# Altium PCB top.PcbDoc
Units mil, origin at the board's own origin, x right, y up, seen from the top; angles counter-clockwise.
Board outline 2922 x 2922 mil, 2 copper layers (Top Layer, Bottom Layer); 13 components, 9 nets, 93 pads, 29 vias.
Unrouted connection lines stored in the file: 21.
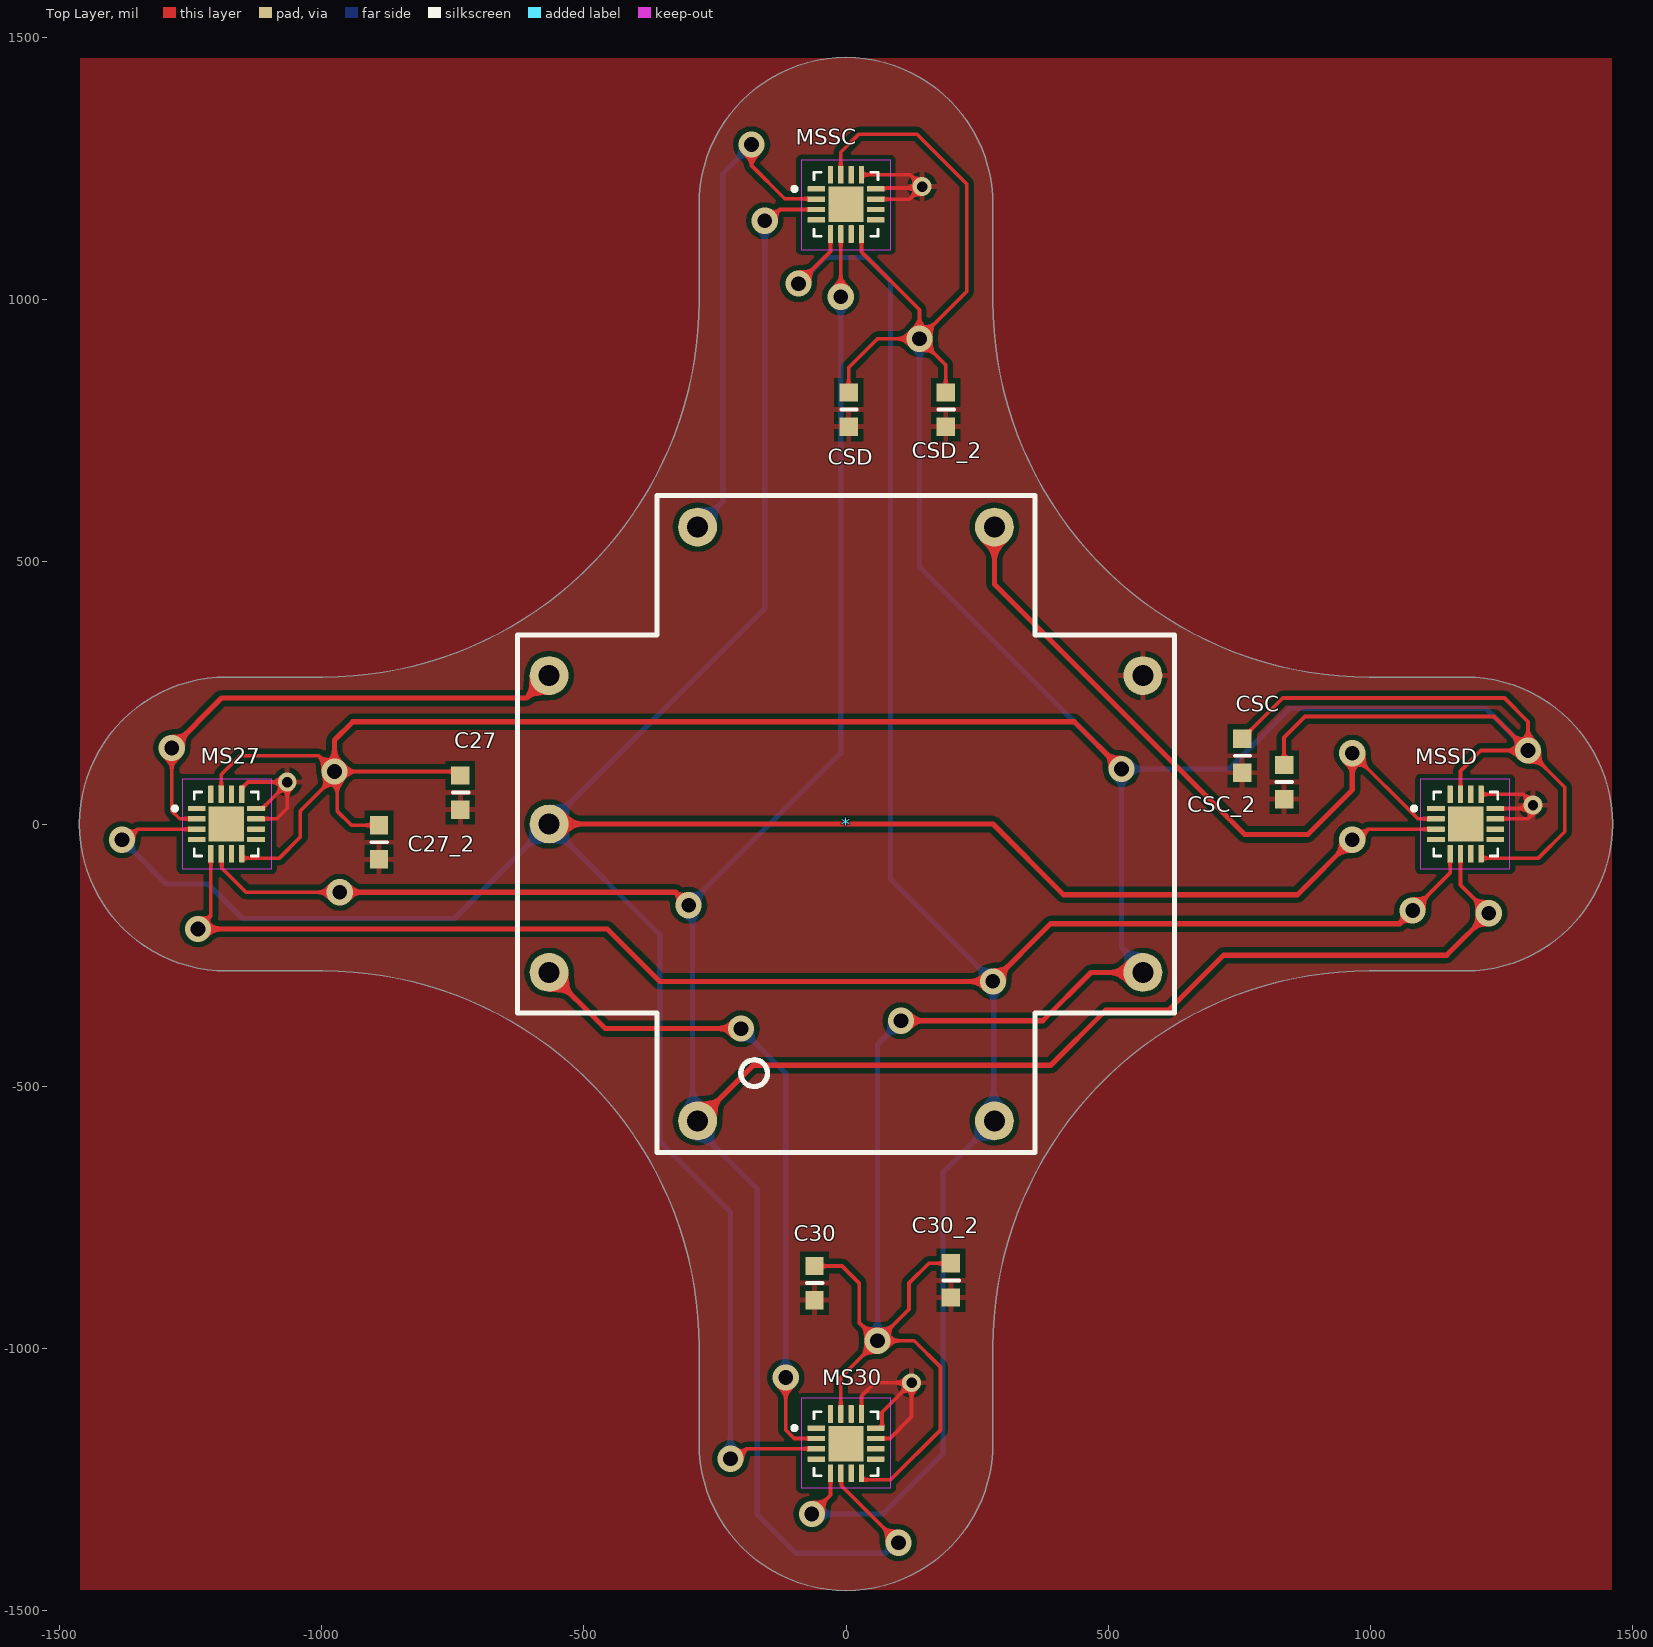
[diagram p0: Top Layer view]
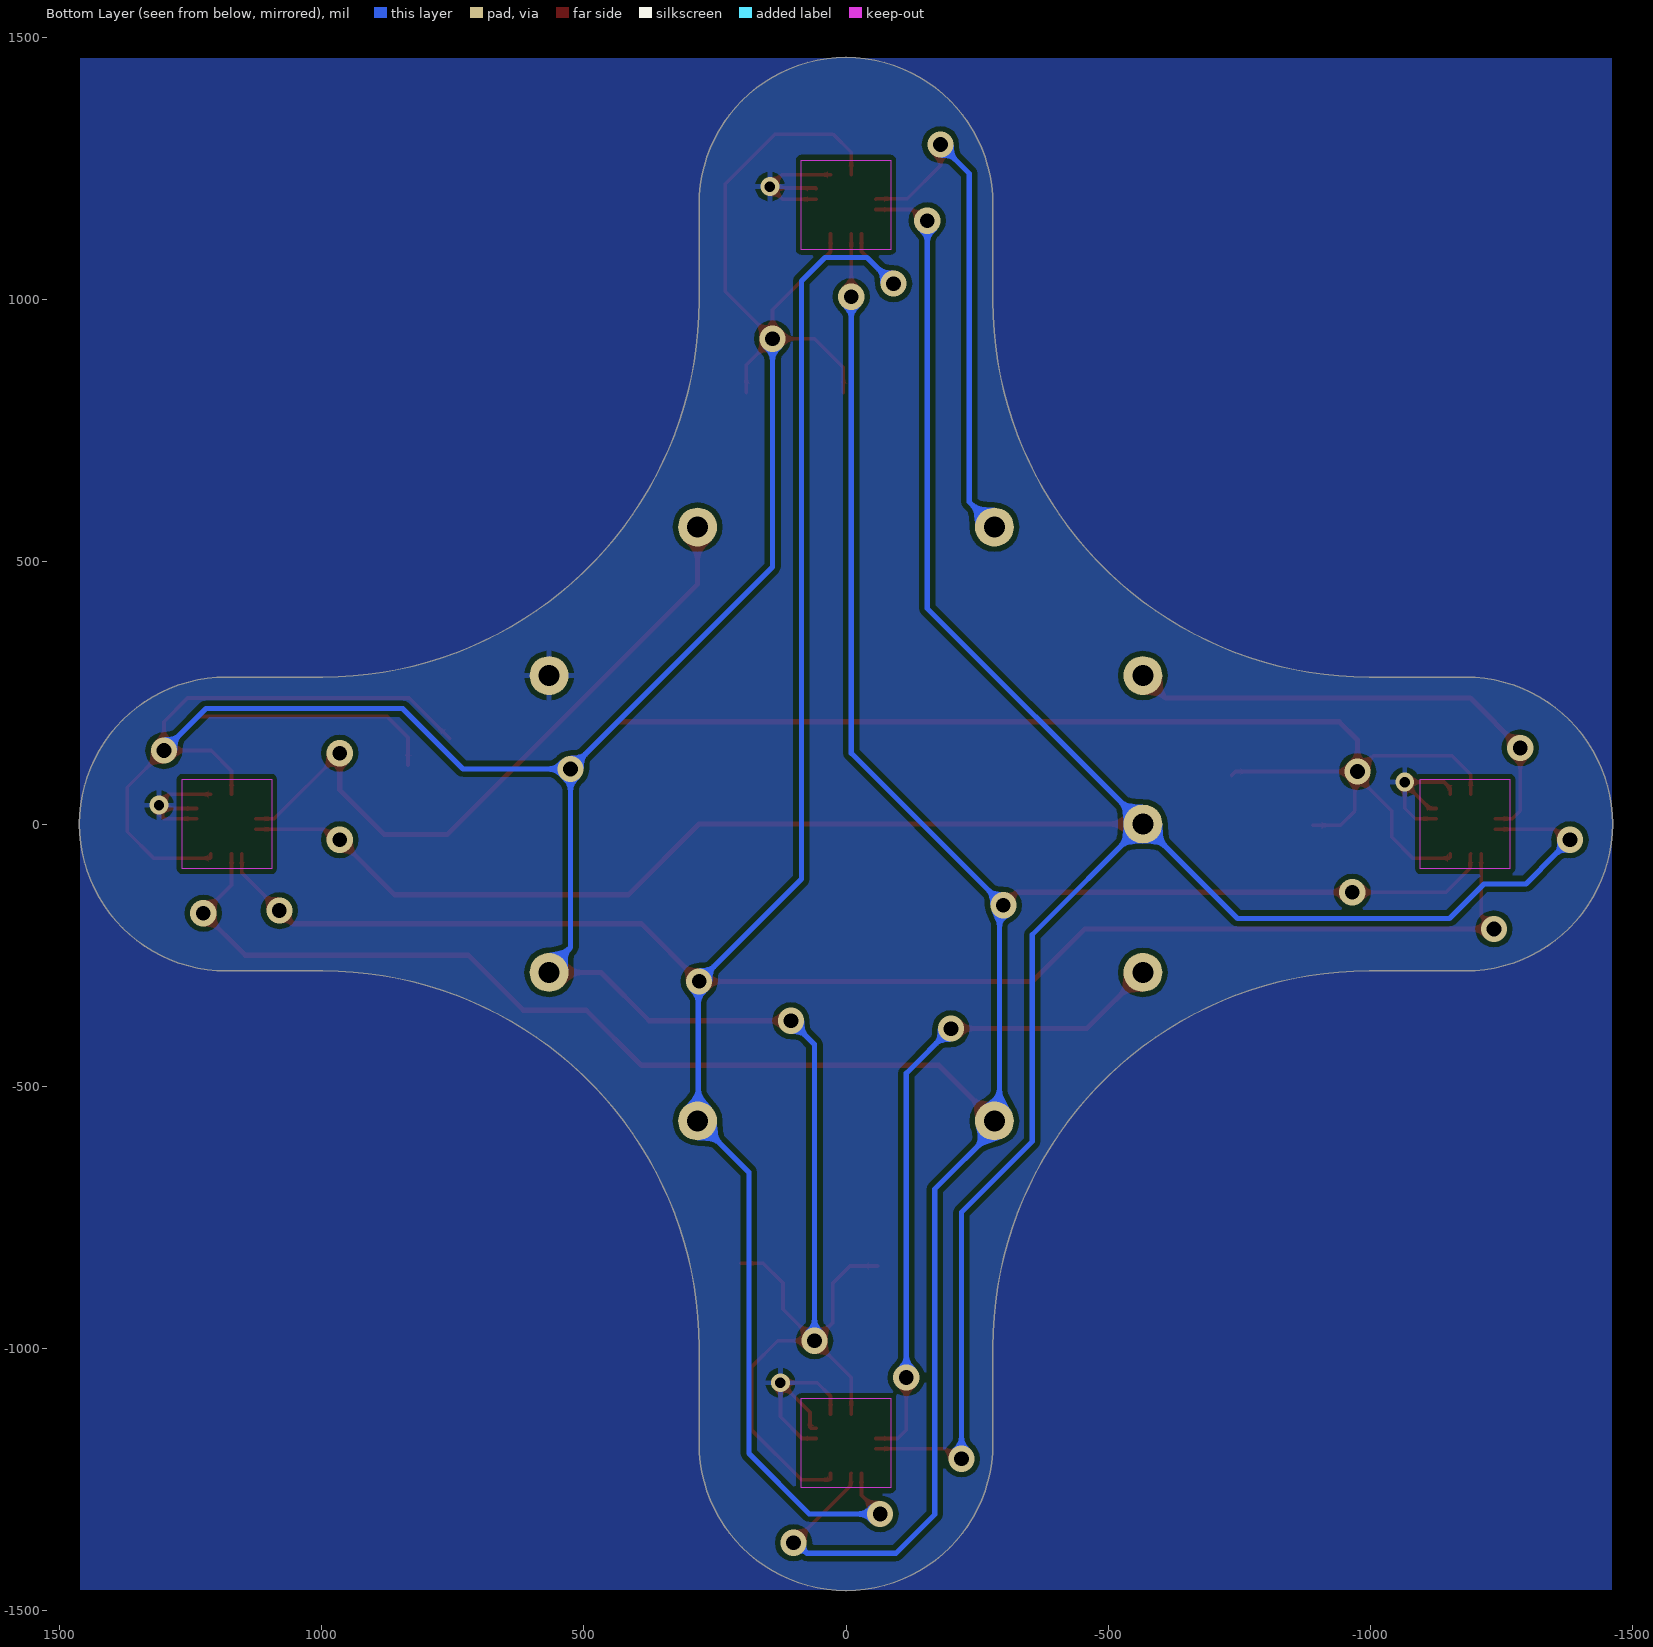
[diagram p1: Bottom Layer view, seen from below]
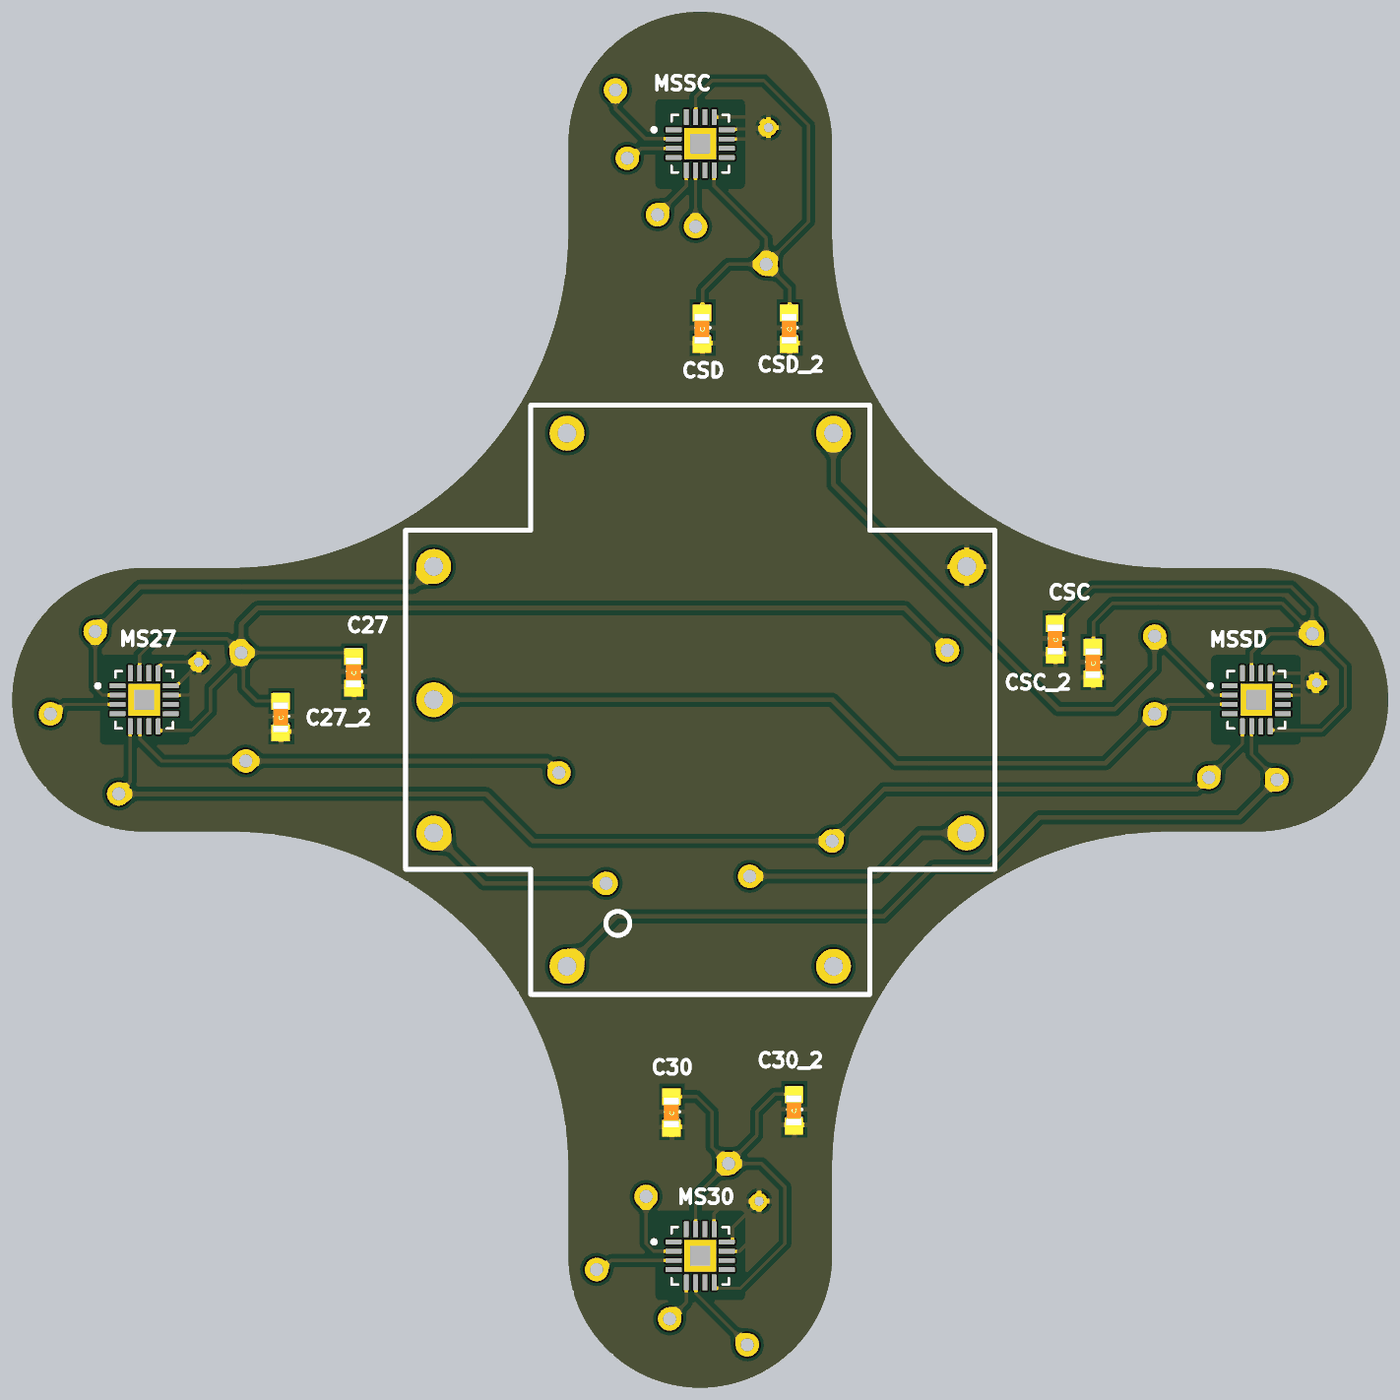
[diagram p2: 3D render of the assembled board from above, using the file's embedded part models]

## Layer stack, top to bottom
Top Solder: solder mask 0.4, Solder Resist, Dk 3.5
Top Layer: signal copper 1.4
Dielectric 1: dielectric 12.6, FR-4, Dk 4.8
Bottom Layer: signal copper 1.4
Bottom Solder: solder mask 0.4, Solder Resist, Dk 3.5

## Board outline
-1181,-280 -996.98,-280 cw(c-996.98,-996.98) -280,-996.98 -280,-1181 ccw(c0,-1181) 280,-1181 280,-996.98 cw(c996.98,-996.98) 996.98,-280 1181,-280 ccw(c1181,0) 1181,280 996.98,280 cw(c996.98,996.98) 280,996.98 280,1181 ccw(c0,1181) -280,1181 -280,996.98 cw(c-996.98,996.98) -996.98,280 -1181,280 ccw(c-1181,0)

## Design rules (kind name [scope] priority, off if disabled: settings)
Clearance [All] p1: gap=10 ignorepadtopadclearanceinfootprint=FALSE except(0: Arc-Hole Track-Hole SMDPad-Hole THPad-Hole Via-Hole Fill-Hole Poly-Hole Region-Hole Text-Hole)
PolygonConnect [All] p1: connectstyle=Relief reliefconductorwidth=10 reliefentries=4 polygonreliefangle="90 Angle" airgapwidth=10
RoutingVias [All] p1: holewidth=28 width=50 viastyle="Through Hole" minholewidth=28 minwidth=50 maxholewidth=28 maxwidth=50
SolderMaskExpansion [All] p1: expansion=4 istentingtop=FALSE
Width [All] p1: maxlimit=10 minlimit=7 preferedwidth=10 toplayer_maxwidth=7 toplayer_prefwidth=7 bottomlayer_minwidth=10 minimp=50.000000 maximp=50.000000 favimp=50.000000
30 further rules are at their usual default settings.

## Components (designator, comment, footprint, x,y, rotation, side; value= is the part's Value field where it differs from the comment)
* "PIN9_small" PIN9_small 0,0 r0 top
C27 "0.1uF" CAP_0603 -735,60 r90 top
C27_2 "0.1uF" CAP_0603 -890,-35 r90 top
C30 "0.1uF" CAP_0603 -60,-875 r90 top
C30_2 "0.1uF" CAP_0603 200,-870 r90 top
CSC "0.1uF" CAP_0603 755,130 r90 top
CSC_2 "0.1uF" CAP_0603 835,80 r90 top
CSD "0.1uF" CAP_0603 5,790 r90 top
CSD_2 "0.1uF" CAP_0603 190,790 r90 top
MS27 "MLX90393" MLX90393 -1181,0 r0 top locked
MS30 "MLX90393" MLX90393 0,-1181 r0 top
MSSC "MLX90393" MLX90393 0,1181 r0 top
MSSD "MLX90393" MLX90393 1181,0 r0 top

## Footprints (in the part's own frame and the unit in brackets; to place one, negate y for a bottom-side part, rotate by r counter-clockwise, add the part's x,y. Pads: shape width x height; smd on the part's side, far side on the other; paste and mask are expansions set on the pad)
CAP_0603 [mil]
  rect 35x35 smd: 1(-32.5,0) 2(32.5,0)
  silkscreen extent 0,-16 0,14, body extent -53,-18 49,21, height 35
MLX90393 [mm]
  rrect25% 0.86x0.26 smd: 1(-1.435,0.75) 2(-1.435,0.25) 3(-1.435,-0.25) 4(-1.435,-0.75) 9(1.435,-0.75) 10(1.435,-0.25) 11(1.435,0.25) 12(1.435,0.75)
  rrect25% 0.26x0.86 smd: 5(-0.75,-1.435) 6(-0.25,-1.435) 7(0.25,-1.435) 8(0.75,-1.435) 13(0.75,1.435) 14(0.25,1.435) 15(-0.25,1.435) 16(-0.75,1.435)
  rect 1.71x1.71 smd paste-2: 17(0,0)
  silkscreen extent -2.59,-1.55 1.55,1.55
PIN9_small [mil]
  round 74 hole 40: 1(-283,-566) 2(283,-566) 3(566,-283) 4(566,283) 5(283,566) 6(-283,566) 7(-566,283) 8(-566,0) 9(-566,-283)
  silkscreen extent -626,-626 626,626

## Part data
C27 C27_2 C30 C30_2 CSC CSC_2 CSD CSD_2: library part CAP, "capacitance"
MS27 MS30 MSSC MSSD: "sensor"

## Via types
v1: diameter 50, hole 28, Top Layer to Bottom Layer, 25 vias
v2: diameter 36, hole 20, Top Layer to Bottom Layer, 4 vias

## Nets (pads, with @x,y where several pads share a name; then routed paths per layer and width w, separated by ;. In a path a pad name is that pad's centre, name@x,y a point inside that pad or via, vN(x,y) a via of type N, cw(c..) or ccw(c..) an arc to the next point about the centre after c; other vN are vias at no path point)
GND: *.4 C27.1 C27_2.1 C30.1 C30_2.1 CSC.1 CSC_2.1 CSD.1 CSD_2.1 MS27.11 MS27.12 MS27.13 MS30.11 MS30.12 MS30.13 MSSC.11 MSSC.12 MSSC.13 MSSD.11 MSSD.12 MSSD.13 | length 1297.2
  Top Layer w7: MS27.13 -1151.47,68.31 -1139.78,80 v2(-1065,80) v2@-1065,77.22 ; MS27.11 -1085.16,9.84 -1065,30 v2@-1065,77.22 ; MS27.12 -1112.69,29.53 v2@-1065,77.22 ; MS30.13 29.53,-1090.47 55,-1065 v2(125,-1065) ; MSSC.13 122.5,1237.5 v2(145,1215) v2@142.15,1212.15 ; MS30.11 83.84,-1171.16 125,-1130 v2(125,-1065) ; MS30.12 67.03,-1151.47 68.65,-1149.85 68.65,-1121.35 v2(125,-1065) ; MSSC.11 120.84,1190.84 v2@142.15,1212.15 ; MSSC.12 58.11,1212.15 v2@142.15,1212.15 ; MSSD.13 1291.19,56.5 v2@1307.69,40 ; MSSD.11 1299.84,9.84 1309.45,19.45 v2(1309.45,35.9) 1309.45,38.24 v2@1307.69,40 ; MSSD.12 1296.68,29.53 1307.15,40 v2@1307.69,40
Net*_1: *.1 MS27.6 MS30.6 MSSC.6 MSSD.6 | length 5855.7
  Top Layer w7: MS27.6 -1189.78,-57.56 -1189.78,-83.81 -1143.59,-130 v1(-965,-130) ; v1(-10,1005) -9.84,1005.16 MSSC.6 ; MS30.6 -8.78,-1238.56 -8.78,-1261.22 v1(100,-1370) ; MSSD.6 1171.16,-116.16 v1(1225,-170)
  Top Layer w10: v1(-965,-130) -325,-130 v1(-300,-155) ; *.1 -177,-460 390,-460 495,-355 615,-355 720,-250 1145,-250 v1(1225,-170)
  Bottom Layer w10: v1(-10,1005) -10,135 v1(-300,-155) -292.35,-162.65 -292.35,-556.65 *.1 -283,-582 -169.14,-695.86 -169.14,-1315.86 -95,-1390 74.14,-1390 94.14,-1370 v1(100,-1370)
Net*_2: *.2 MS27.5 MS30.5 MSSC.5 MSSD.5 | length 5786.3
  Top Layer w7: v1(-1235,-200) -1235,-198.74 -1210.53,-174.27 MS27.5 ; v1(-90.62,1030) -29.53,1091.1 MSSC.5 ; v1(-65,-1315) -29.53,-1279.53 MS30.5 ; v1(1080,-165) 1151.47,-93.53 MSSD.5
  Top Layer w10: v1(-1235,-200) -455,-200 -355,-300 v1(280,-300) 390,-190 1055,-190 v1(1080,-165)
  Bottom Layer w10: v1(-90.62,1030) -90,1030 -40,1080 40,1080 85,1035 85,-105 v1(280,-300) 281.5,-301.5 281.5,-564.5 *.2 185,-664 185,-1200 70,-1315 v1(-65,-1315)
Net*_3: *.3 C27.2 C27_2.2 C30.2 C30_2.2 CSC.2 CSC_2.2 CSD.2 CSD_2.2 MS27.8 MS27.15 MS30.8 MS30.15 MSSC.8 MSSC.15 MSSD.8 MSSD.15 | length 10058.9
  Top Layer w7: MS27.15 -1190.84,94.16 -1155,130 -1005,130 v1(-975,100) ; MS27.8 -1151.47,-63.38 -1149.85,-65 -1080,-65 -1040,-25 -1040,25 -980,85 -980,95 v1(-975,100) ; C27_2.2 -942.5,-2.5 -970,25 -970,95 v1(-975,100) ; C27.2 -742.5,100 v1(-975,100) ; C30.2 -7.5,-842.5 25,-875 25,-950 v1(60,-985) ; MS30.15 -9.84,-1054.84 v1(60,-985) ; MSSC.15 -9.84,1280.16 25,1315 135,1315 230,1220 230,1015 v1(140,925) ; CSD.2 5,870 60,925 v1(140,925) ; MS30.8 29.53,-1248.38 31.15,-1250 85,-1250 180,-1155 180,-1035 130,-985 v1(60,-985) ; MSSC.8 29.53,1090.47 140,980 v1(140,925) ; CSD_2.2 190,875 v1(140,925) ; C30_2.2 157.5,-837.5 120,-875 120,-925 v1(60,-985) ; CSC.2 832.5,240 1255,240 1300,195 v1(1300,140) ; CSC_2.2 835,165 875,205 1235,205 v1(1300,140) ; MSSD.15 1171.16,101.16 1210,140 v1(1300,140) ; MSSD.8 1210.53,-63.38 1212.15,-65 1320,-65 1370,-15 1370,70 v1(1300,140)
  Top Layer w10: v1(-975,100) -975,160 -940,195 435,195 v1(525,105) ; v1(105,-375) 375,-375 467,-283 *.3
  Bottom Layer w10: v1(60,-985) 60,-420 v1(105,-375) ; v1(140,925) 140,490 v1(525,105) ; *.3 566,-276.15 525,-235.15 v1(525,105) ; v1(1300,140) 1220,220 845,220 730,105 v1(525,105)
Net*_5: *.5 MSSD.2 | length 1305.1
  Top Layer w7: v1(965,135) 1090.16,9.84 MSSD.2
  Top Layer w10: *.5 283,457 760,-20 880,-20 965,65 v1(965,135)
Net*_6: *.6 MSSC.2 | length 961.7
  Top Layer w7: v1(-180,1295) -180,1255 -116.91,1191.91 -57.56,1191.91 MSSC.2
  Bottom Layer w10: *.6 -235,614 -235,1240 v1(-180,1295)
Net*_7: *.7 MS27.2 | length 949.9
  Top Layer w7: v1(-1285,145) -1285,25 -1269.84,9.84 MS27.2
  Top Layer w10: v1(-1285,145) -1190,240 -609,240 *.7
Net*_8: *.8 MS27.3 MS30.3 MSSC.3 MSSD.3 | length 5852.1
  Top Layer w7: v1(-1380,-30) -1370.11,-30 -1349.95,-9.84 MS27.3 ; v1(-220,-1210) -208.36,-1210 -189.21,-1190.84 MS30.3 ; v1(-155,1150) -147.11,1150 -125.95,1171.16 MSSC.3 ; v1(965,-30) 974.89,-30 995.05,-9.84 MSSD.3
  Top Layer w10: *.8 280,0 415,-135 860,-135 v1(965,-30)
  Bottom Layer w10: v1(-1380,-30) -1353.5,-56.5 -1295.82,-114.18 -1215.82,-114.18 -1150,-180 -746,-180 *.8 ; v1(-220,-1210) -220,-740 -355,-605 -355,-211 *.8 ; v1(-155,1150) -155,411 *.8
Net*_9: *.9 MS30.2 | length 1275.7
  Top Layer w7: v1(-115,-1055) -115,-1155 -98.84,-1171.16 MS30.2
  Top Layer w10: *.9 -459,-390 v1(-200,-390)
  Bottom Layer w10: v1(-200,-390) -115,-475 v1(-115,-1055)
pads on no net: MS27.1 MS27.4 MS27.7 MS27.9 MS27.10 MS27.14 MS27.16 MS27.17 MS30.1 MS30.4 MS30.7 MS30.9 MS30.10 MS30.14 MS30.16 MS30.17 MSSC.1 MSSC.4 MSSC.7 MSSC.9 MSSC.10 MSSC.14 MSSC.16 MSSC.17 MSSD.1 MSSD.4 MSSD.7 MSSD.9 MSSD.10 MSSD.14 MSSD.16 MSSD.17

## Polygon pours and split planes (outlines as drawn)
GND on Bottom Layer "GND_L02_P001" (solid, remove dead copper, pour order 1): -1460,-1460 -1460,1460 1460,1460 1460,-1460
no net on Bottom Layer "NONET_L02_P000" (solid, remove dead copper, pour order 0): -1265,85
GND on Top Layer "GND_L01_P002" (solid, remove dead copper, pour order 2): -1460,-1460 -1460,1460 1460,1460 1460,-1460

## Keep-outs
Top Layer:
  rectangle: 1095,-85 1265,85
  rectangle: -85,-1265 85,-1095
  rectangle: -85,1095 85,1265
  rectangle: -1265,-85 -1095,85
Bottom Layer:
  rectangle: 1095,-85 1265,85
  rectangle: -85,1095 85,1265
  rectangle: -85,-1265 85,-1095
  rectangle: -1265,-85 -1095,85

## Silkscreen, mask and mechanical layers (free items; w line width, h text height)
Mechanical 1:
  lines w10: -996.98,-280 cw(c-996.98,-996.98) -280,-996.98 -280,-1181 ccw(c0,-1181) 280,-1181 280,-996.98 cw(c996.98,-996.98) 996.98,-280 1181,-280 ccw(c1181,0) 1181,280 996.98,280 cw(c996.98,996.98) 280,996.98 280,1181 ccw(c0,1181) -280,1181 -280,996.98 cw(c-996.98,996.98) -996.98,280 -1181,280 ccw(c-1181,0) -1181,-280 -995,-280